# EAGLE board Simple-Bug-2SC9014 (EAGLE 7.2.0)
Simple FM Transmitter with Electret Microphone, based on NPN Transistor
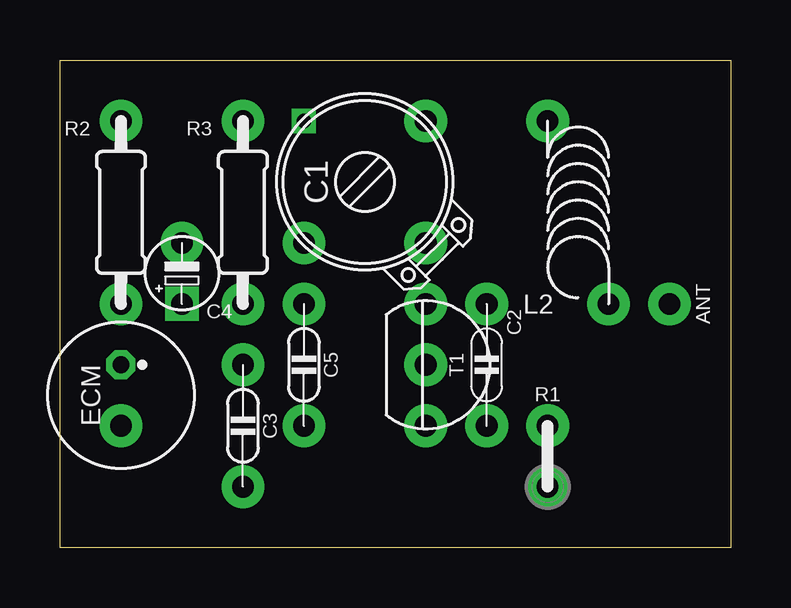
[diagram p0: board, top side]
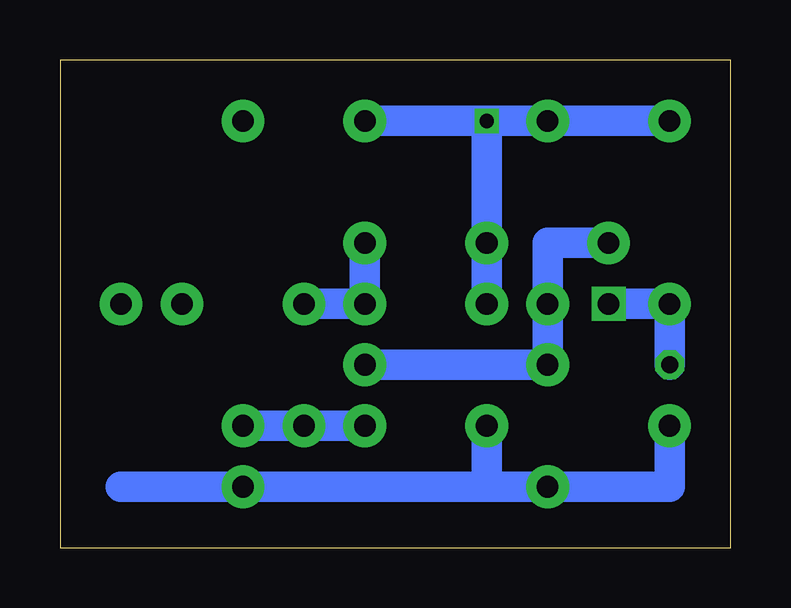
[diagram p1: board, bottom side, seen from below]

Size 27.94 x 20.32 mm. Coordinates in mm from the lower left corner, seen from the top.
Outline: 27.94,0 0,0 0,20.32 27.94,20.32 27.94,0
Copper layers (1*16): Top 0.035mm / dielectric 1.5mm / Bottom 0.035mm
Design rules "default": minimum track width 10mil, minimum drill 24mil, track to track 8mil, track to pad 8mil, pad to pad 8mil, via to via 8mil, smd to smd 8mil, copper to edge 40mil, drill to drill 8mil, minimum pad ring 10mil, minimum via ring 8mil, stop-mask expansion 4mil, vias tented up to drill 0mil, thermal gap 10mil
Net classes: 0 default: width 0.61 mm

## Footprints (pad centres in the part's own frame; a part is rotated, then mirrored left to right if it is on the bottom)
SPAD = drill 0.9 pad 1.778: 1 0,0
TRIM-2222-808 = drill 0.9 pad 1.778: 1 -2.54,2.54; 2 -2.54,-2.54; 3 2.54,-2.54
C050-020X036 = drill 0.9 pad 1.778: 1 -2.54,0; 2 2.54,0
C050-020X036/V = drill 0.9 pad 1.778: 1 0,-2.54; 2 0,2.54
E2,5-3/V = drill 0.9 square: + 0,1.27 | drill 0.9 pad 1.778: - 0,-1.27
ECM-4 = drill 0.7 pad 1.2 octagon: 1 0,1.27 | drill 0.9 pad 1.778: 2 0,-1.27
L-04/8V = drill 0.9 pad 1.778: 1 1.27,-5.08; 2 -1.27,2.54
0204/2V = drill 0.9 pad 1.778: 1 0,1.27; 2 0,-1.27
0204/7-V = drill 0.9 pad 1.778: 1 0,3.81; 2 0,-3.81
TO92-EBC = drill 0.9 pad 1.778: B 0,0; C 0,2.54; E 0,-2.54

## Placement (x,y rotation side)
ANT  ANT  [SPAD]  25.4,10.16 180 top
C1  1.6-15pF  [TRIM-2222-808]  12.7,15.24 90 top
C2  4.7pF  [C050-020X036]  17.78,7.62 270 top
C3  1nF  [C050-020X036/V]  7.62,5.08 180 top
C4  1μF  [E2,5-3/V]  5.08,11.43 180 top
C5  22nF  [C050-020X036/V]  10.16,7.62 180 top
ECM  ECM-4  [ECM-4]  2.54,6.35 0 top
L2  1μH  [L-04/8V]  21.59,15.24 0 top
R1  4.7Ω  [0204/2V]  20.32,3.81 0 top
R2  4.7kΩ  [0204/7-V]  2.54,13.97 0 top
R3  10kΩ  [0204/7-V]  7.62,13.97 0 top
T1  2SC9014  [TO92-EBC]  15.24,7.62 0 top

## Library data of the parts
ANT = pad
C1 = cap-trim
C2-C5 = c
ECM = ECM
L2 = l
R1-R3 = r
T1 = t

## Nets
+UB: C1.1 C1.3 C5.1 R2.1 R3.1
GND: C3.2 C5.2 ECM.2 R1.2
N$2: C1.2 C2.1 T1.C
N$3: C2.2 R1.1 T1.E
N$5: C3.1 C4.- R3.2 T1.B
N$6: C4.+ ECM.1 R2.2

## Tracks (layer width: path | path; a pad name or v marks a point on that pad's centre or on a via)
+UB  (via drill 0.6)
  Bottom 1.27: v10.16,17.78 C1.1 C5.1 | v10.16,17.78 R3.1 R2.1 | v10.16,17.78 C1.3
GND
  Bottom 1.27: 10.16,2.54 25.4,2.54 R1.2 | 10.16,2.54 C3.2 2.54,2.54 ECM.2 | C5.2 10.16,2.54
N$2
  Bottom 1.27: C2.1 T1.C C1.2
N$3
  Bottom 1.27: T1.E C2.2 R1.1
N$5
  Bottom 1.27: T1.B C3.1 R3.2 7.62,12.7 C4.-
N$6
  Bottom 1.27: ECM.1 R2.2 C4.+